# Altium PCB PCB3.PcbDoc
Units mil, origin at the board's own origin, x right, y up, seen from the top; angles counter-clockwise.
Board outline 4400 x 3600 mil, 4 copper layers (Top Layer, Int1 (GND), Int2 (GND), Bottom Layer), stack 53.912 mil thick; 56 components, 50 nets, 254 pads, 86 vias.
Unrouted connection lines stored in the file: 30.
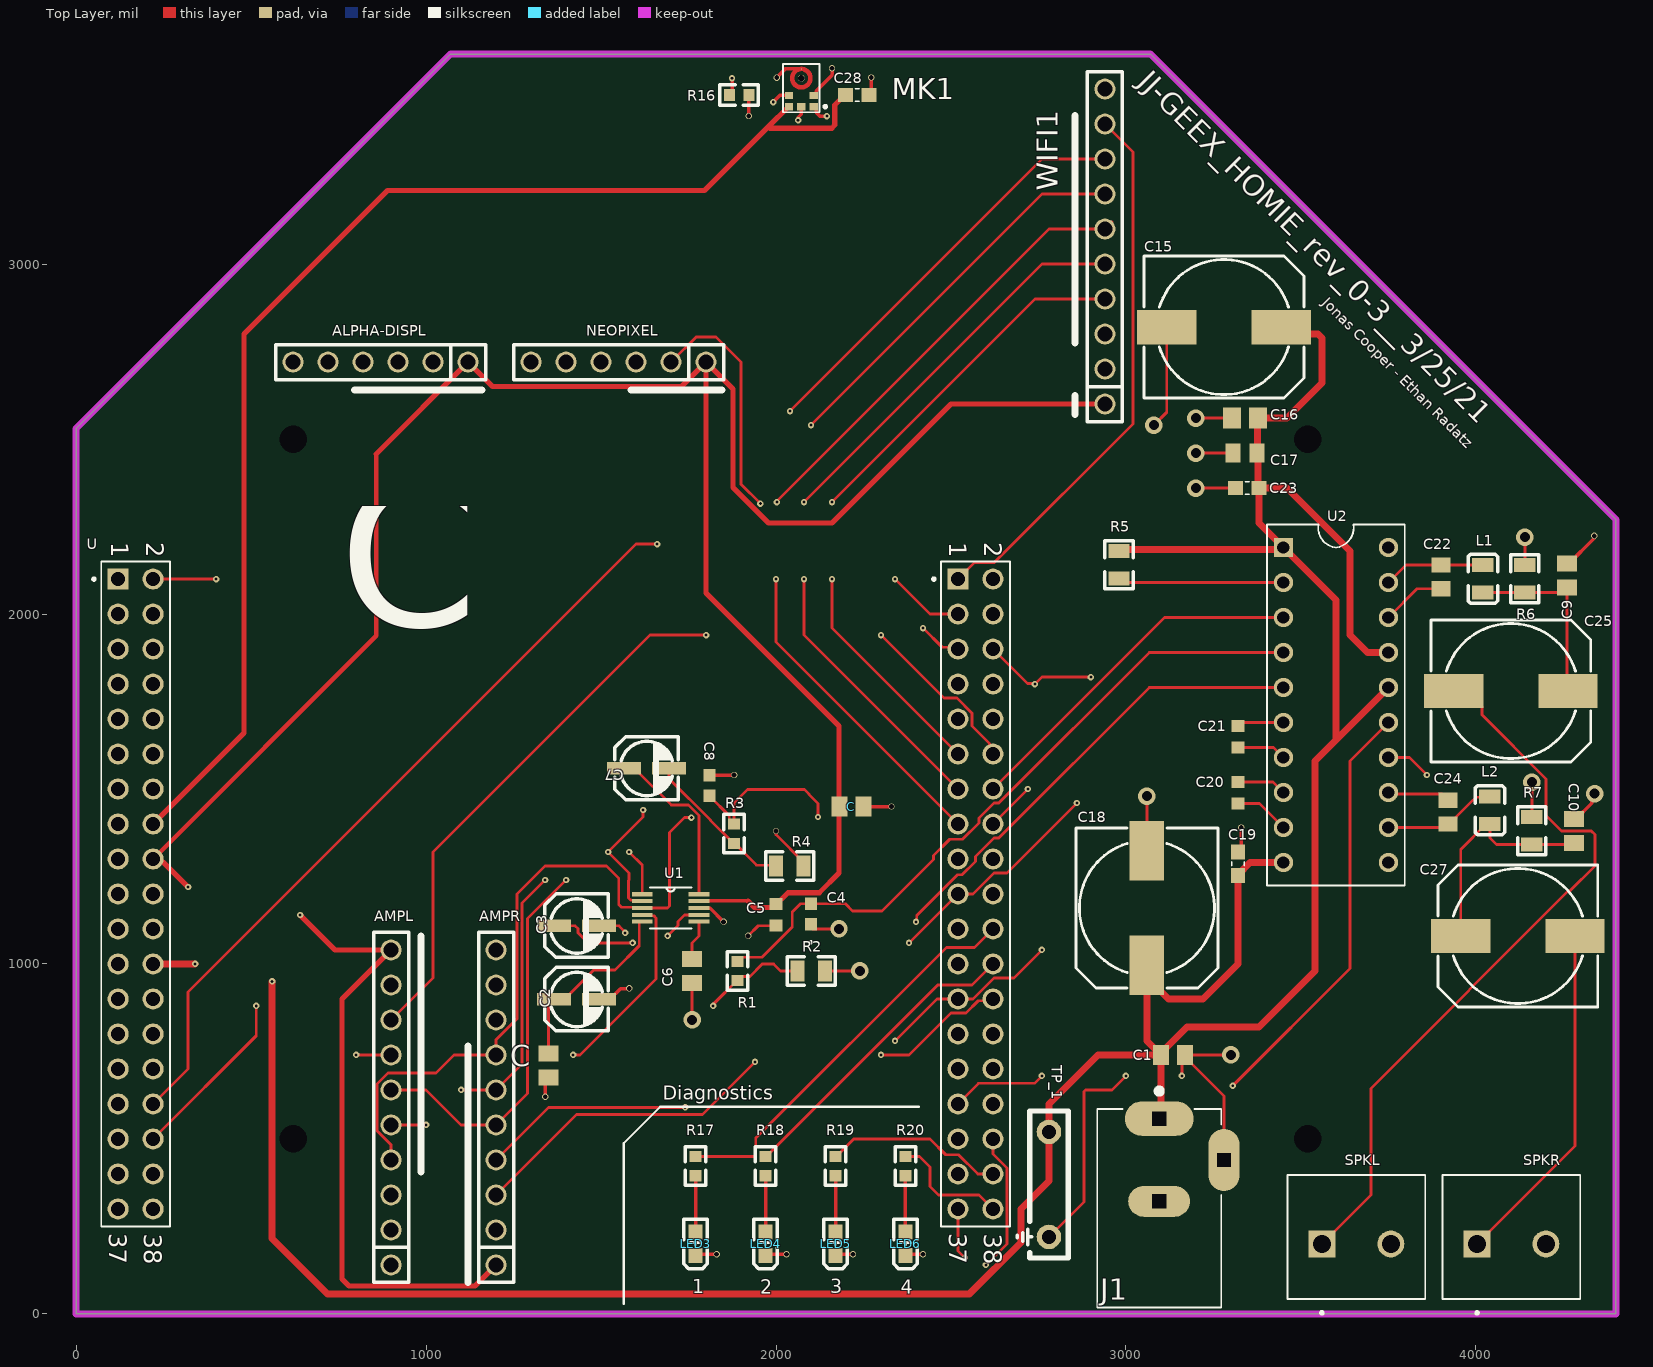
[diagram p0: Top Layer view]
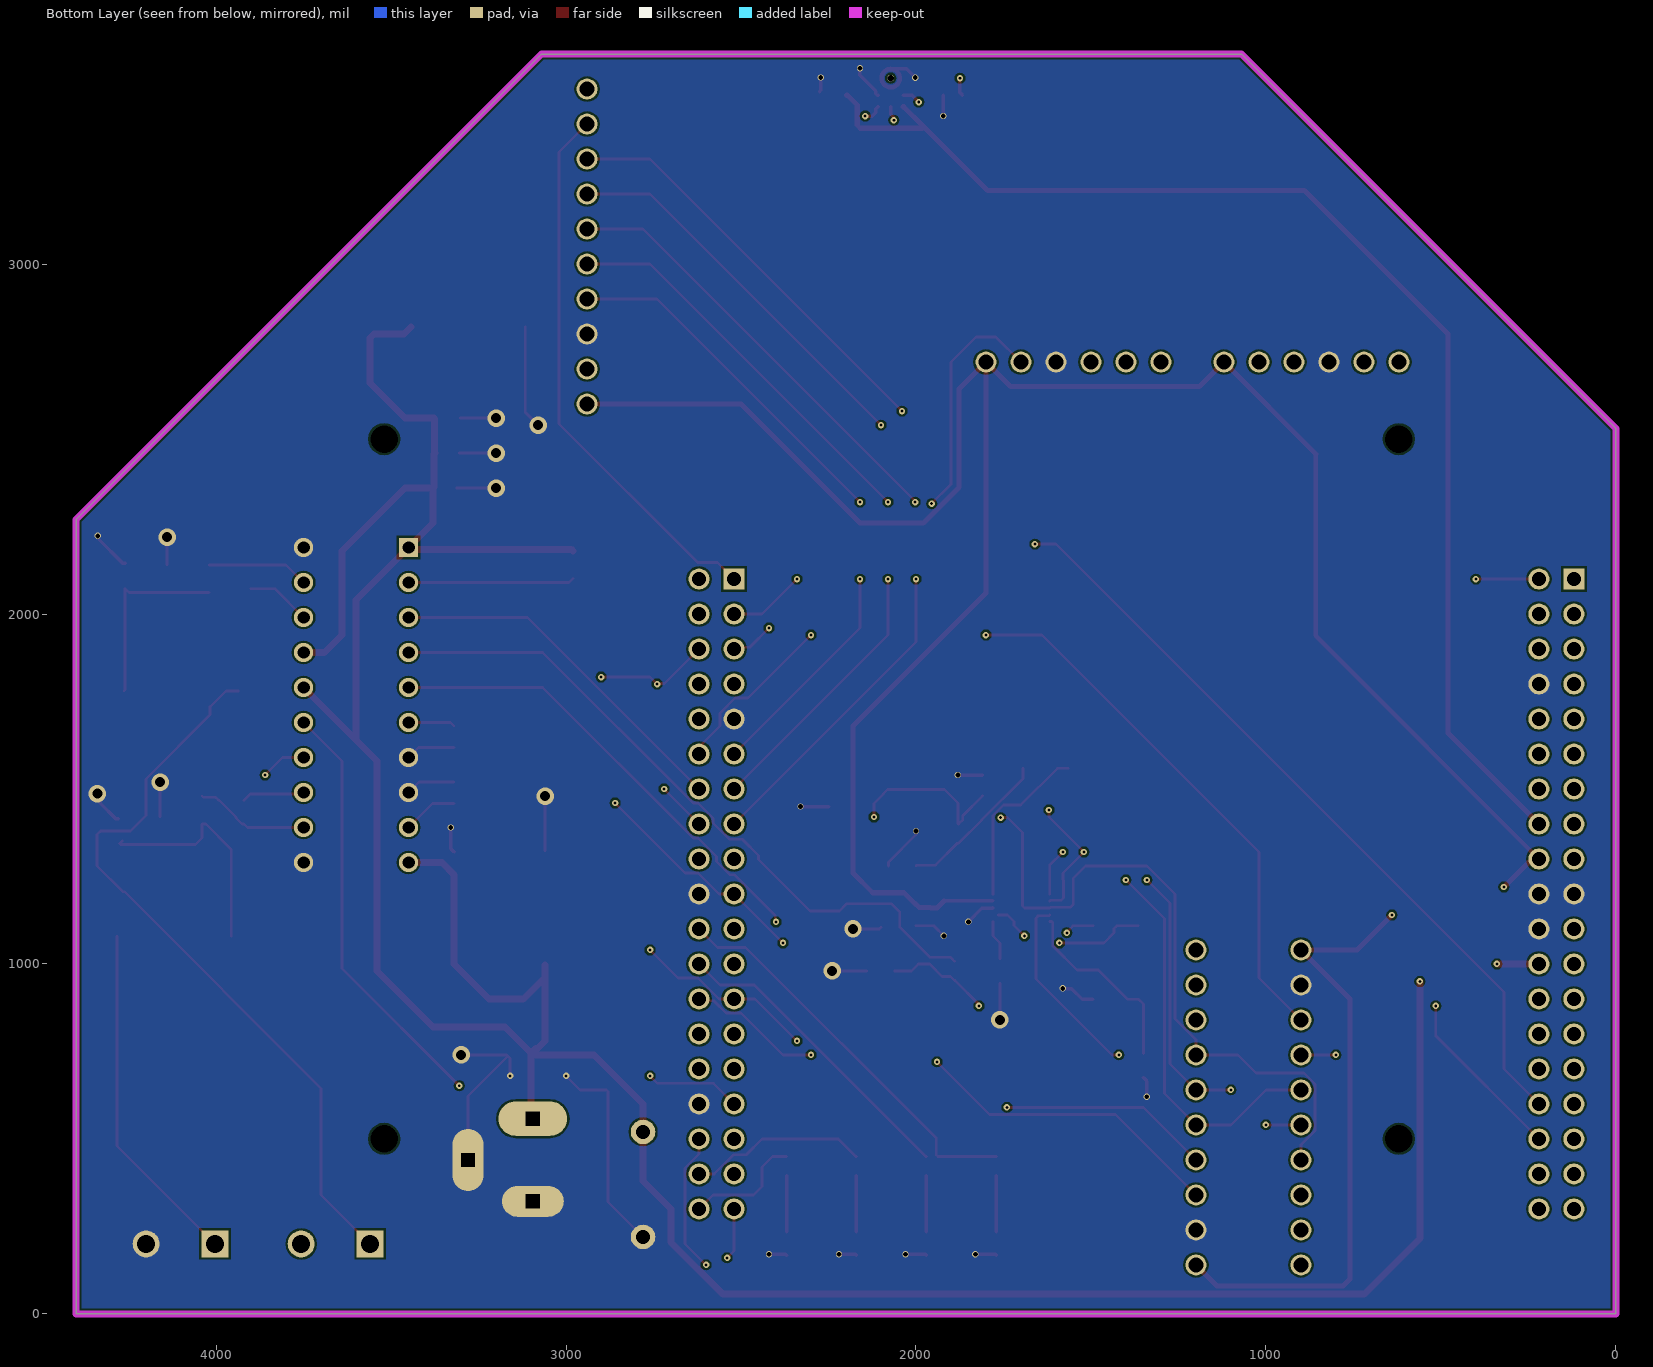
[diagram p1: Bottom Layer view, seen from below]
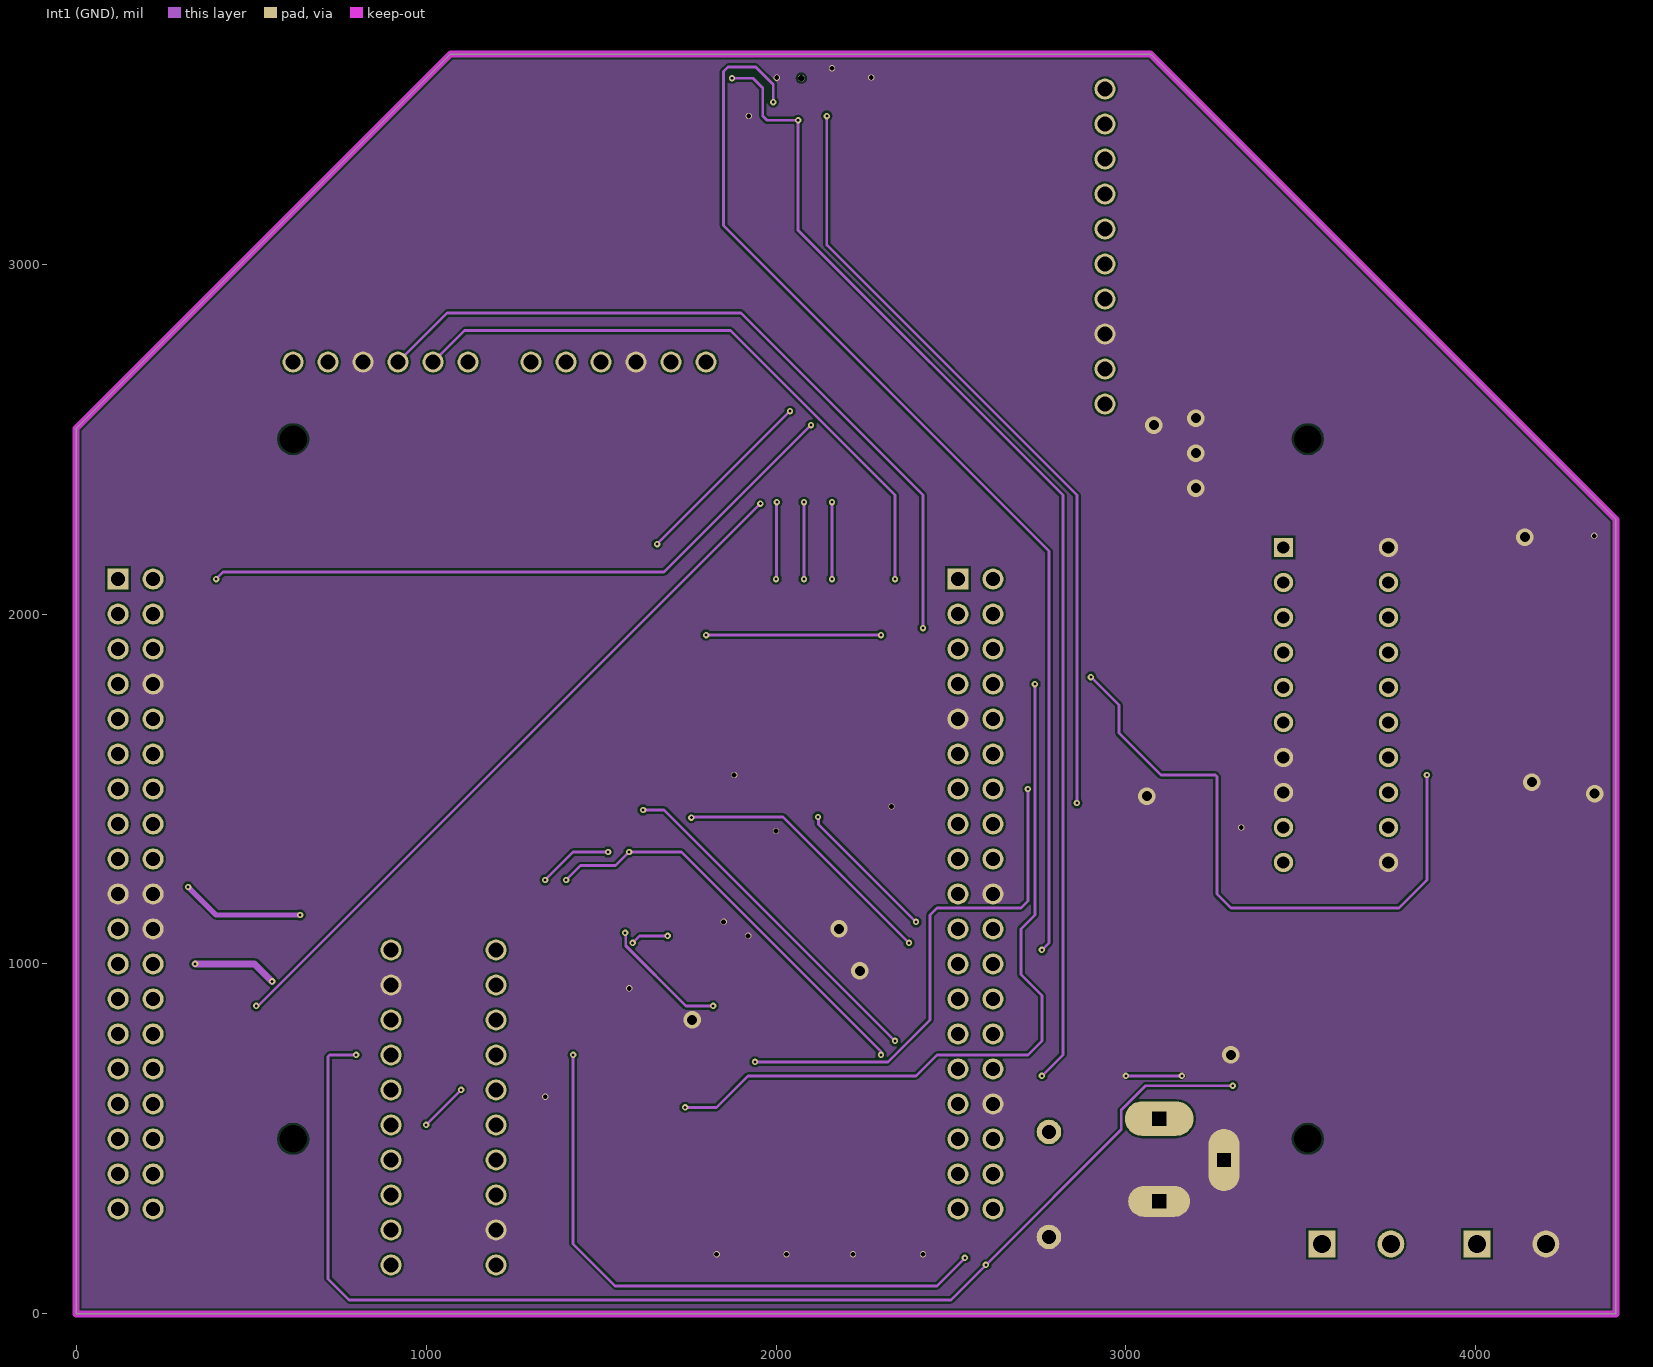
[diagram p2: Int1 (GND)]
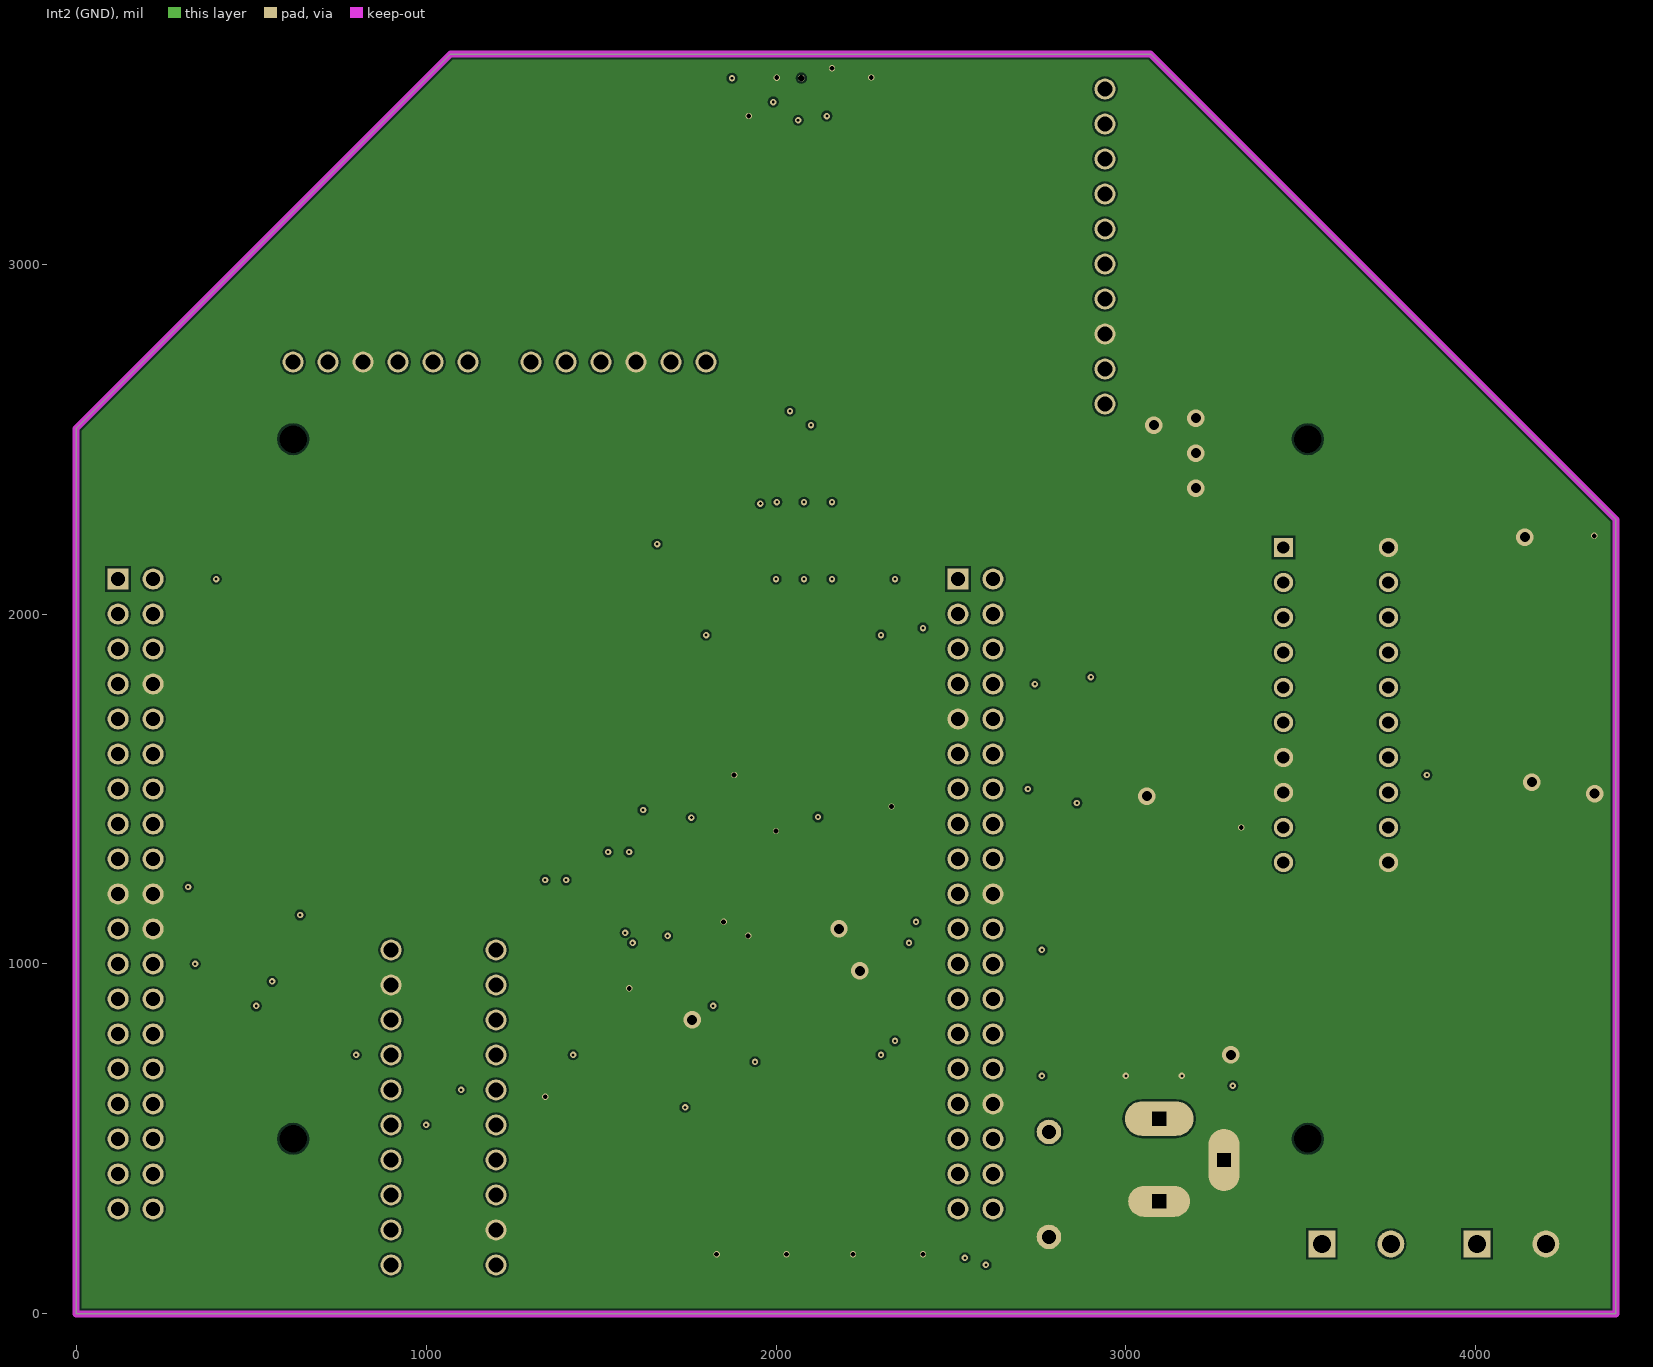
[diagram p3: Int2 (GND)]

## Layer stack, top to bottom
Top Solder: solder mask 1, SM-001, Dk 4
Top Layer: signal copper 1.378
Dielectric 1: prepreg 5.1, PP-017, Dk 4.3
Dielectric 2: prepreg 5.1, PP-017, Dk 4.3
Int1 (GND): signal copper 1.378
Dielectric 3: core 28, Core-039, Dk 4.8
Int2 (GND): signal copper 1.378
Dielectric 4: prepreg 5.1, PP-017, Dk 4.3
Dielectric 5: prepreg 5.1, PP-017, Dk 4.3
Bottom Layer: signal copper 1.378
Bottom Solder: solder mask 1, SM-001, Dk 4

## Board outline
0,0 0,2530 1070,3600 3070,3600 4400,2270 4400,0

## Design rules (kind name [scope] priority, off if disabled: settings)
Clearance [All] p1: gap=6 ignorepadtopadclearanceinfootprint=FALSE except(0: Arc-Hole Track-Hole SMDPad-Hole THPad-Hole Via-Hole Fill-Hole Poly-Hole Region-Hole Text-Hole)
MinimumSolderMaskSliver [All] p1: minsoldermaskwidth=6
PlaneClearance [All] p1: clearance=8
PlaneConnect [All] p1: planeconnectstyle=Direct reliefexpansion=20 reliefentries=4 reliefconductorwidth=10 reliefairgap=10
PolygonConnect [All] p1: connectstyle=Direct reliefconductorwidth=10 reliefentries=4 polygonreliefangle="90 Angle" airgapwidth=10
RoutingVias [All] p1: holewidth=8.27 width=18.5 viastyle="Through Hole" minholewidth=8.27 minwidth=18.5 maxholewidth=28 maxwidth=50
SilkToSilkClearance [All] p1: silktosilkclearance=6
SilkToSolderMaskClearance [IsPad] p1: minsilkscreentomaskgap=6 clearancetoexposedcopper=TRUE
SolderMaskExpansion [All] p1: expansion=4 istentingtop=FALSE
UnRoutedNet [All] p1: checkbadconnections=TRUE
Width "Schematic Width Constraint_1" [InNet('3V3_BRD')] p1: maxlimit=100 minlimit=6 preferedwidth=13 minimp=50.000000 maximp=50.000000 favimp=50.000000
Width 12vbrd [InNet('12V_BRD')] p2: maxlimit=20 minlimit=10 preferedwidth=20 minimp=50.000000 maximp=50.000000 favimp=50.000000
Width 5v [InNet('5V_BRD')] p3: maxlimit=15 minlimit=15 preferedwidth=15 minimp=50.000000 maximp=50.000000 favimp=50.000000
Width 3v3 [InNet('3V3_BRD')] p4: maxlimit=15 minlimit=15 preferedwidth=15 minimp=50.000000 maximp=50.000000 favimp=50.000000
Width 12v [InNet('12V')] p5: maxlimit=20 minlimit=20 preferedwidth=20 minimp=50.000000 maximp=50.000000 favimp=50.000000
Width [All] p6: maxlimit=10 minlimit=6 preferedwidth=8 minimp=50.000000 maximp=50.000000 favimp=50.000000
24 further rules are at their usual default settings.

## Classes and differential pairs
component class Sheet3.2_AMP: C9 C10 C15 C16 C17 C18 C19 C20 C21 C22 C23 C24 C25 C27 L1 L2 R5 R6 R7 SPKL SPKR U2
component class Sheet3.1_DAC: C C2 C3 C4 C5 C6 C7 C8 R1 R2 R3 R4 U1
component class Sheet1_MCU2.0: LED3 LED4 LED5 LED6 R17 R18 R19 R20 U
component class Sheet5_Pin_Headers: ALPHA-DISPL AMPL AMPR NEOPIXEL WIFI1
component class Sheet4_Audio_In: C28 MK1 R16
component class Sheet2_Power: C1 J1 TP_1

## Components (designator, comment, footprint, x,y, rotation, side; value= is the part's Value field where it differs from the comment)
ALPHA-DISPL "PPTC061LFBN-RC" 6_PIN_100MIL 1120,2720 r180 top value=Female
AMPL "PPTC101LFBN-RC" 10_PIN_100MIL 900,140 r90 top value=Female
AMPR "PPTC101LFBN-RC" 10_PIN_100MIL 1200,140 r90 top value=Female
C "C_10nf_0805" CAPC2012X140N 2215.55,1450 r0 top value=10nf
C "C_10nf_0805" CAPC2012X140N 1350,710 r270 top value=10nf
C1 "C_22uF_0805" CAPC2012X140N 3134.45,740 r0 top
C2 "CE_3.3uF_0405" Lelon3.3uf 1430,900 r180 top
C3 "CE_3.3uF_0405" Lelon3.3uf 1430,1110 r180 top
C4 "0603B272K500NT" CAP_0603_S_WAL 2100,1142.6 r90 top value=2.7nf
C5 "C_1uF_0603" CAPC1608X90N 2000,1140 r270 top value=1uF
C6 "C_22uF_0805" CAPC2012X140N 1760,980 r270 top
C7 "CE_3.3uF_0405" Lelon3.3uf 1630,1560 r180 top
C8 "0603B272K500NT" CAP_0603_S_WAL 1810,1510 r270 top value=2.7nf
C9 "C_.68uF_0805" CAPC2012X140N 4260,2110 r90 top
C10 "C_.68uF_0805" CAPC2012X140N 4280,1380 r270 top
C15 "CE_470uF_1010" 140CLH-1010 3280,2820 r0 top
C16 "C_100nf_0805" CAPC2012X70 3340,2560 r180 top
C17 "CL21A106KAYNNNE" CAPC2012X135N 3340,2460 r180 top
C18 "CE_470uF_1010" 140CLH-1010 3060,1160 r270 top
C19 "C_100nF_0603" CAPC1608X90 3320,1286.54 r90 top
C20 "C_1uF_0603" CAPC1608X90N 3320,1489.29 r90 top value=1uF
C21 "C_1uF_0603" CAPC1608X90N 3320,1649.29 r270 top value=1uF
C22 "C_220nf_0805" CAPC2012X135N 3900,2106.02 r90 top
C23 "C_100nF_0603" CAPC1608X90 3346.54,2360 r180 top
C24 "C_220nf_0805" CAPC2012X135N 3920,1433.98 r270 top
C25 "CE_470uF_1010" 140CLH-1010 4100,1780 r0 top
C27 "CE_470uF_1010" 140CLH-1010 4120,1080 r180 top
C28 "C_100nF_0603" CAPC1608X90 2232.26,3483.06 r0 top
J1 "PJ-002AH" CUI_PJ-002AH 3094.96,558.11 r270 top
L1 "22uH" L0805 4022.52,2100.55 r90 top
L2 "22uH" L0805 4042.52,1439.29 r90 top
LED3 "KT-0603R" LED0603-R-RD 1770,200 r90 top value=Red
LED4 "KT-0603R" LED0603-R-RD 1970,200 r90 top value=Red
LED5 "KT-0603R" LED0603-R-RD 2170,200 r90 top value=Red
LED6 "KT-0603R" LED0603-R-RD 2370,200 r90 top value=Red
MK1 "ICS-43434" MIC_ICS-43434 2072.26,3503.06 r180 top
NEOPIXEL "PPTC061LFBN-RC" 6_PIN_100MIL 1800,2720 r180 top value=Female
R1 "1 kOhm" R0603 1890,980 r90 top value=1kOhm
R2 "1 kOhm" R0805 2099.53,980.16 r180 top value=10kOhm
R3 "1 kOhm" R0603 1880,1372.44 r90 top value=1kOhm
R4 "1 kOhm" R0805 2038.27,1280.16 r180 top value=10kOhm
R5 "1 kOhm" R0805 2979.84,2139.53 r270 top value=10kOhm
R6 "1 kOhm" R0805 4139.84,2099.53 r270 top value=4.7kOhm
R7 "1 kOhm" R0805 4160.16,1381.73 r90 top value=4.7kOhm
R16 "100 kOhm" R0603 1894.7,3483.06 r180 top value=100kOhm
R17 "1 kOhm" R0603 1770,422.44 r270 top value=1kOhm
R18 "1 kOhm" R0603 1970,422.44 r270 top value=1kOhm
R19 "1 kOhm" R0603 2170,422.44 r270 top value=1kOhm
R20 "1 kOhm" R0603 2370,422.44 r270 top value=1kOhm
SPKL "TB001-500-02BE" CUI_TB001-500-02BE 3560,200 r0 top
SPKR "TB001-500-02BE" CUI_TB001-500-02BE 4003.15,200 r0 top
TP_1 "10x Probe TP" TP10x_Probe 2780,370 r270 top
U "ST-MORPHO-WB" ST-MORPHO-WB 1370,1725.59 r0 top
U1 "CS4344-CZZR" SOP50P490X110-10N 1699,1160 r0 top
U2 "TPA3122D2N" DIP20-2.54-26.2X7.62MM 3600,1740 r270 top
WIFI1 "PPTC101LFBN-RC" 10_PIN_100MIL 2940,2600 r90 top value=Female

## Footprints (in the part's own frame and the unit in brackets; to place one, negate y for a bottom-side part, rotate by r counter-clockwise, add the part's x,y. Pads: shape width x height; smd on the part's side, far side on the other; paste and mask are expansions set on the pad)
6_PIN_100MIL [mil]
  round 60 hole 43.31: 1(0,0) 2(100,0) 3(200,0) 4(300,0) 5(400,0) 6(500,0)
  silkscreen extent -50,-50 550,50
10_PIN_100MIL [mil]
  round 60 hole 43.31: 1(0,0) 2(100,0) 3(200,0) 4(300,0) 5(400,0) 6(500,0) 7(600,0) 8(700,0) 9(800,0) 10(900,0)
  silkscreen extent -50,-50 950,50
140CLH-1010 [mm]
  rect 4.3x2.5 smd: NEG(-4.15,0) POS(4.15,0)
  silkscreen extent -5.8,-5.15 5.8,5.15
CAP_0603_S_WAL [mil]
  rect 36x35 smd paste+0 mask+0: 1(-29.5,0) 2(29.5,0)
  silkscreen extent -83,-3 -78,3, body extent 0,0 10,10, height 10
CAPC1608X90 [mm]
  rect 1.1x1 smd: 1(-0.85,0) 2(0.85,0)
  silkscreen extent -0.15,-0.45 0.15,0.45
CAPC1608X90N [mm]
  rect 0.87x0.93 smd: 1(-0.78,0) 2(0.78,0)
CAPC2012X70 [mm]
  rect 1.3x1.5 smd: 1(-0.95,0) 2(0.95,0)
CAPC2012X135N [mm]
  rect 1.1x1.38 smd: 1(-0.863,0) 2(0.863,0)
CAPC2012X140N [mm]
  rect 1.16x1.47 smd: 1(-0.875,0) 2(0.875,0)
CUI_PJ-002AH [mm]
  oval 2.5x5 hole 1 square: 1(0,0)
  oval 2.25x4.5 hole 1 square: 2(6,0)
  oval 4.5x2.25 hole 1 square: 3(3,4.7)
  silkscreen extent -2.2,-4.5 13.7,4.5
CUI_TB001-500-02BE [mm]
  rect 1.95x1.95 hole 1.3: 1(0,0)
  round 1.95 hole 1.3: 2(5,0)
  silkscreen extent -2.5,-5.1 7.5,5
DIP20-2.54-26.2X7.62MM [mm]
  rect 1.4x1.4 hole 0.9: 1(-11.43,-3.81)
  round 1.4 hole 0.9: 2(-8.89,-3.81) 3(-6.35,-3.81) 4(-3.81,-3.81) 5(-1.27,-3.81) 6(1.27,-3.81) 7(3.81,-3.81) 8(6.35,-3.81) 9(8.89,-3.81) 10(11.43,-3.81) 11(11.43,3.81) 12(8.89,3.81) 13(6.35,3.81) 14(3.81,3.81) 15(1.27,3.81) 16(-1.27,3.81) 17(-3.81,3.81) 18(-6.35,3.81) 19(-8.89,3.81) 20(-11.43,3.81)
  silkscreen extent -13.1,-5 13.1,5, body extent -12.7,-5.46 12.7,5.46, height 5.08
L0805 [mm]
  rect 1x1.55 smd: 1(-0.998,0.064) 2(1.002,0.064)
  silkscreen extent -1.78,-1.02 1.78,1.14
LED0603-R-RD [mil]
  rect 43x39 smd: 1(34.5,0) 2(-32.5,0)
  silkscreen extent -70,-34 70,34
Lelon3.3uf [mm]
  rect 2.46x0.91 smd: NEG(-1.64,0.024) POS(1.64,0.024)
  silkscreen extent -2.3,-2.29 2.3,2.31
MIC_ICS-43434 [mm]
  rect 0.6x0.522 smd paste-1: 1(-0.9,1.361) 2(-0.9,0.539) 4(0.9,0.539) 5(0.9,1.361) 6(0,1.361)
  rect 0.1x0.1 smd paste-1 mask+0: 3(-0.015,-1.383)
  round 0.5 hole 0.5 unplated: ""(0,-0.713)
  Top Layer region: 250 vertices and 0 holes, not listed, extent -0.81,-1.53 0.81,0.1
  silkscreen extent -1.84,-1.75 1.33,1.75
R0603 [mm]
  rect 0.8x0.9 smd: 1(-0.7,0) 2(0.7,0)
  silkscreen extent -1.4,-0.75 1.4,0.76
R0805 [mm]
  rect 1x1.55 smd: 1(-1.028,0.004) 2(0.972,0.004)
  silkscreen extent -1.78,-1.02 1.72,1.02
SOP50P490X110-10N [mil]
  rect 59x12 smd: 1(-81,39) 2(-81,20) 3(-81,0) 4(-81,-20) 5(-81,-39) 6(81,-39) 7(81,-20) 8(81,0) 9(81,20) 10(81,39)
  silkscreen extent -59,-59 59,59
ST-MORPHO-WB [mm]
  rect 1.53x1.53 hole 1.02: CN7_1(-31.75,9.51) CN10_1(29.21,9.51)
  round 1.53 hole 1.02: CN7_2(-29.21,9.51) CN7_3(-31.75,6.97) CN7_4(-29.21,6.97) CN7_5(-31.75,4.43) CN7_6(-29.21,4.43) CN7_7(-31.75,1.89) CN7_8(-29.21,1.89) CN7_9(-31.75,-0.65) CN7_10(-29.21,-0.65) CN7_11(-31.75,-3.19) CN7_12(-29.21,-3.19) CN7_13(-31.75,-5.73) CN7_14(-29.21,-5.73) CN7_15(-31.75,-8.27) CN7_16(-29.21,-8.27) CN7_17(-31.75,-10.81) CN7_18(-29.21,-10.81) CN7_19(-31.75,-13.35) CN7_20(-29.21,-13.35) CN7_21(-31.75,-15.89) CN7_22(-29.21,-15.89) CN7_23(-31.75,-18.43) CN7_24(-29.21,-18.43) CN7_25(-31.75,-20.97) CN7_26(-29.21,-20.97) CN7_27(-31.75,-23.51) CN7_28(-29.21,-23.51) CN7_29(-31.75,-26.05) CN7_30(-29.21,-26.05) CN7_31(-31.75,-28.59) CN7_32(-29.21,-28.59) CN7_33(-31.75,-31.13) CN7_34(-29.21,-31.13) CN7_35(-31.75,-33.67) CN7_36(-29.21,-33.67) CN7_37(-31.75,-36.21) CN7_38(-29.21,-36.21) CN10_2(31.75,9.51) CN10_3(29.21,6.97) CN10_4(31.75,6.97) CN10_5(29.21,4.43) CN10_6(31.75,4.43) CN10_7(29.21,1.89) CN10_8(31.75,1.89) CN10_9(29.21,-0.65) CN10_10(31.75,-0.65) CN10_11(29.21,-3.19) CN10_12(31.75,-3.19) CN10_13(29.21,-5.73) CN10_14(31.75,-5.73) CN10_15(29.21,-8.27) CN10_16(31.75,-8.27) CN10_17(29.21,-10.81) CN10_18(31.75,-10.81) CN10_19(29.21,-13.35) CN10_20(31.75,-13.35) CN10_21(29.21,-15.89) CN10_22(31.75,-15.89) CN10_23(29.21,-18.43) CN10_24(31.75,-18.43) CN10_25(29.21,-20.97) CN10_26(31.75,-20.97) CN10_27(29.21,-23.51) CN10_28(31.75,-23.51) CN10_29(29.21,-26.05) CN10_30(31.75,-26.05) CN10_31(29.21,-28.59) CN10_32(31.75,-28.59) CN10_33(29.21,-31.13) CN10_34(31.75,-31.13) CN10_35(29.21,-33.67) CN10_36(31.75,-33.67) CN10_37(29.21,-36.21) CN10_38(31.75,-36.21)
  silkscreen extent -33.6,-37.48 32.98,10.78
TP10x_Probe [mil] "Small Probs footprint"
  round 70 hole 40: 1(-150,0) 2(150,0)
  silkscreen extent -210,-90 210,55

## Part data
ALPHA-DISPL NEOPIXEL: library part JF_6_PIN_FEMALE, "6 Position Header Connector 0.100\" (2.54mm) Through Hole Tin", Digikey Link=https://www.digikey.com/product-detail/en/PPTC061LFBN-RC/S7004-ND/810145/?itemSeq=304982353, Digikey Part=S7004-ND
AMPL AMPR WIFI1: library part JF_10_PIN_FEMALE, "10 Position Header Connector 0.100\" (2.54mm) Through Hole Tin", Digikey Link=https://www.digikey.com/product-detail/en/PPTC101LFBN-RC/S7008-ND/810149/?itemSeq=304982352, Digikey Part=S7008-ND
C C: "CL21B103KBANNNC    10000pF Â±10% 50V Ceramic Capacitor X7R 0805 (2012 Metric)", LCSC#=C1710, Package="0805 Samsung", Digi-Key_Part_Number=1276-1015-1-ND, DigiKey-Purchase-URL=https://snapeda.com/shop?store=DigiKey&id=46816, MF=Samsung, MP=CL21B103KBANNNC, SnapEDA_Link=https://www.snapeda.com/parts/CL21B103KBANNNC/Samsung%20Electro-Mechanics/view-part/46816/?ref=snap
C1 C6: "22µF 0805 ±20% 25V Ceramic Capacitor X5R 0805 (2012 Metric)", LCSC#=C45783, Package="0805 Samsung", Check_prices=https://www.snapeda.com/parts/CL21A226MAQNNNE/Samsung%20Electro-Mechanics/view-part/620487/?ref=eda, Digi-Key_Part_Number=1276-2908-1-ND, MF=Samsung, MP=CL21A226MAQNNNE, Purchase-URL=https://pricing.snapeda.com/search/part/CL21A226MAQNNNE/?ref=eda, SnapEDA_Link=https://www.snapeda.com/parts/CL21A226MAQNNNE/Samsung%20Electro-Mechanics/view-part/620487/?ref=snap
C2 C3 C7: "Aluminum Electrolytic Capacitors - SMD", LCSC#=C134505, Package=None, Availability=Unavailable, MF=Lelon, MP=VES3R3M1HTR-0405L, Price=None, SnapEDA_Link=https://www.snapeda.com/parts/VZH471M1ETR-1010/Lelon/view-part/2450679/?ref=snap
C4 C8: library part C_2.7nf_0603, "10nf 0603 cap", LCSC#=C1609, Package=0603, Manufacturer_Part_Number=0603B272K500NT, Vendor=FH
C5 C20 C21: "1uF ±10% 50V Ceramic Capacitor X7R 0603 (1608 Metric)", LCSC#=c15849, Package="0603 Samsung", Availability=Good, MF=Samsung, MP=CL10A105KB8NNNC, Price=None, SnapEDA_Link=https://www.snapeda.com/parts/CL10B102KB8NNNC/Samsung/view-part/544114/?ref=snap
C9 C10: ".68µF 0805 ±20% 25V Ceramic Capacitor X5R 0805 (2012 Metric)", LCSC#=C71069, Package="0805 Samsung", MF=Samsung, MP=CL21B684KOFNNNE
C15 C18 C25 C27: "Aluminum Electrolytic Capacitors - SMD", LCSC#=C249933, Package=None, Availability=Unavailable, MF=Lelon, MP=VZH471M1ETR-1010, Price=None, SnapEDA_Link=https://www.snapeda.com/parts/VZH471M1ETR-1010/Lelon/view-part/2450679/?ref=snap
C16: "0.1ÂµF Â±10% 50V Ceramic Capacitor X7R 0805 _2012 Metric_  CC0805KRX7R9BB104", LCSC#=C49678, Package="0805 Yageo", MF=Yageo, MP=CC0805KRX7R9BB104, Price=None, SnapEDA_Link=https://www.snapeda.com/parts/CC0805KRX7R9BB104/Yageo/view-part/105548/?ref=snap
C17: "10ÂµF Â±10% 25V Ceramic Capacitor X5R 0805 (2012 Metric)CL21A106KAYNNNE", LCSC#=C15850, Package="0805 Samsung", Check_prices=https://www.snapeda.com/parts/CL21A106KAYNNNE/Samsung/view-part/3598482/?ref=eda, MF=Samsung, MP=CL21A106KAYNNNE, SnapEDA_Link=https://www.snapeda.com/parts/CL21A106KAYNNNE/Samsung/view-part/3598482/?ref=snap
C19 C23 C28: "0.1µF/100nF  Â±10% 50V Ceramic Capacitor X7R 0603 _1608 Metric_", LCSC#=C14663, Package="0603 Yageo", Digi-Key_Part_Number=311-1344-1-ND, Digi-Key_Purchase_URL=https://www.digikey.com/product-detail/en/yageo/CC0603KRX7R9BB104/311-1344-1-ND/2103128?utm_source=snapeda&utm_medium=aggregator&utm_campaign=symbol, MF=Yageo, MP=CC0603KRX7R9BB104, SnapEDA Link=https://www.snapeda.com/parts/CC0603KRX7R9BB104/Yageo/view-part/78680/?ref=snap
C22 C24: "CL21B224KBFNNNE", LCSC#=C5378, Package=None, Availability=Unavailable, MP=CL21B224KBFNNNE
J1: "2.0 x 6.5 mm, 5.0 A, Horizontal, Through Hole, Dc Power Jack Connector", Package=None, CUI_purchase_URL=https://www.cuidevices.com/product/interconnect/connectors/dc-power-connectors/jacks/pj-002ah?utm_source=snapeda.com&utm_medium=referral&utm_campaign=snapedaBOM, Digi-Key_Part_Number=CP-002AH-ND, Digi-Key_Purchase_URL=https://www.digikey.com/product-detail/en/cui-devices/PJ-002AH/CP-002AH-ND/408446?utm_source=snapeda&utm_medium=aggregator&utm_campaign=symbol, MF="CUI Devices", MP=PJ-002AH, SnapEDA_Link=https://www.snapeda.com/parts/PJ-002AH/CUI%20Devices/view-part/448876/?ref=snap
L1 L2: library part L_22uH, "22uH SDFL2012T220KTF", LCSC=C32375, Manufacturer_Part_Number=SDFL2012T220KTF, Built_By="Jonas Cooper", Vendor=Sunlord
LED3 LED4 LED5 LED6: library part LED_RED_0603, "LIGHT EMITTING DIODES (LED) RED 520~625NM 90~100MCD@20MA TOP VIEW 0603 ROHS", LCSC#=C2286, MFR="Hubei KENTO Elec", MFR#=KT-0603R
MK1: "60Hz ~ 20kHz Digital, IÂ²S Microphone MEMS _Silicon_ 1.65V ~ 3.63V Omnidirectional _-26 Â±1dB @ 94dB SPL_ Solder Pads", Package="TDK InvenSense", Availability=Unavailable, MF="TDK InvenSense", MP=ICS-43434, Price=None, SnapEDA_Link=https://www.snapeda.com/parts/ICS-43434/TDK%20InvenSense/view-part/4478548/?ref=snap
R1 R3 R17 R18 R19 R20: library part R_1kOhm_0603, "1kOhm +-1%  0603", LCSC#=21190, MFR=Uniroyal, MFR#=0603WAF1001T5E
R2 R4 R5: library part R_10kOhm_0805, "10kOhm +-1%  0805", LCSC#=C17414, MFR=Uniroyal, MFR#=0805W8F1002T5E
R6 R7: library part R_4.7kOhm_0805, "4.7kOhm +-1%  0805", LCSC#=C17673, MFR=Uniroyal, MFR#=0805W8F4701T5E
R16: library part R_100kOhm_0603, "100kOhm +-1%", LCSC#=C25803, MFR=Uniroyal, MFR#=0603WAF1003T5E
SPKL SPKR: "2~24 Poles, Screw Type, Horizontal, 5.0 Pitch, 22~12 _AWG_, Terminal Block Connector", Package=None, Availability=Unavailable, CUI_purchase_URL=https://www.cuidevices.com/product/interconnect/connectors/terminal-blocks/tb001-500-series?utm_source=snapeda.com&utm_medium=referral&utm_campaign=snapedaBOM, MF="CUI Devices", MP=TB001-500-02BE, Price=None, SnapEDA_Link=https://www.snapeda.com/parts/TB001-500-02BE/CUI%20Devices/view-part/3590292/?ref=snap
TP_1: library part TP_10x_Probe, "Test Point 300 mil centers"
U: "P-NUCLEO-WB55 Header Footprint", Package="TSOT-23 STMicroelectronics", Availability=Unavailable, MF=STMicroelectronics, MP=NUCLEO-F030R8, Price=None, SnapEDA_Link=https://www.snapeda.com/parts/NUCLEO-F030R8/STMicroelectronics/view-part/240805/?ref=snap
U1: "DAC, Audio 24 b 192k IÂ²S 10-SSOP", JLC PartNum=C8952, Package="TSSOP-10 Cirrus Logic", Availability=Unavailable, MF="Cirrus Logic", MP=CS4344-CZZR, SnapEDA_Link=https://www.snapeda.com/parts/CS4344-CZZR/Cirrus%20Logic%20Inc./view-part/33568/?ref=snap
U2: "15-W stereo, 30-W mono, 10- to 26-V supply, analog input Class-D audio amplifier w/ SE output in DIP 20-PDIP -40 to 85", Package="PDIP-20 Texas Instruments", Availability=Warning, Check_prices=https://www.snapeda.com/parts/TPA3122D2N/Texas%20Instruments/view-part/321530/?ref=eda, MF="Texas Instruments", MP=TPA3122D2N, Price=None, Purchase-URL=https://pricing.snapeda.com/search/part/TPA3122D2N/?ref=eda, SnapEDA_Link=https://www.snapeda.com/parts/TPA3122D2N/Texas%20Instruments/view-part/321530/?ref=snap

## Free pads (board coordinates)
  round 0 hole 78.74 unplated: 2(620,500) 3(620,2500) 4(3520,500) 6(3520,2500)

## Via types
v1: diameter 18.5, hole 8.27, Top Layer to Bottom Layer, 57 vias
v2: diameter 18.5, hole 13, Top Layer to Bottom Layer, 15 vias
v3: diameter 50, hole 28, Top Layer to Bottom Layer, 12 vias
v4: diameter 18, hole 13, Top Layer to Bottom Layer, 2 vias

## Nets (pads, with @x,y where several pads share a name; then routed paths per layer and width w, separated by ;. In a path a pad name is that pad's centre, name@x,y a point inside that pad or via, vN(x,y) a via of type N, cw(c..) or ccw(c..) an arc to the next point about the centre after c; other vN are vias at no path point)
3V3_BRD: C28.1 MK1.5 U.CN7_16 | length 3628.2
  Top Layer w15: U.CN7_16 344.33,1524.33 480,1660 480,2800 890,3210 1795.81,3210 1978.87,3393.06 ; MK1.5 2035.29,3449.47 1978.87,3393.06 ; C28.1 2198.18,3482.45 2196.21,3482.45 2168.01,3454.24 2168.01,3397.09 2159.22,3388.3 1983.62,3388.3 1978.87,3393.06
5V_BRD: ALPHA-DISPL.1 AMPL.10 AMPR.1 C5.1 C.1@2181.1,1450 NEOPIXEL.1 U1.9 U.CN7_18 WIFI1.1 | length 8492.9
  Top Layer w10: U1.9 1920,1180
  Top Layer w13: U.CN7_18 857.5,1937.5 857.5,2457.5
  Top Layer w15: U.CN7_18 228.66,1291.34 248.66,1291.34 v1(320,1220) ; v1(640,1140) 740,1040 AMPL.10 760,900 760,100 780,80 1140,80 AMPR.1 ; 857.5,2457.5 ALPHA-DISPL.1 1190,2650 1730,2650 NEOPIXEL.1 ; 1920,1180 1940,1160 1958.11,1160 1959.19,1161.08 1990.37,1161.08 C5.1 2001.18,1170.71 2034.07,1203.6 2123.6,1203.6 2180,1260 2180,1680 1800,2060 NEOPIXEL.1 ; WIFI1.1 2500,2600 2160,2260 1978.59,2260 1877.28,2361.3 1877.28,2642.72 NEOPIXEL.1
  Int1 (GND) w15: v1(320,1220) 400,1140 v1(640,1140)
12V_BRD: C1.1 C15.POS C16.1 C17.1 C18.POS C19.1 C23.1 J1.1 R5.1 TP_1.1 U2.1 U2.10 U2.16 U2.17 U.CN7_24 | length 9466.8
  Top Layer w20: U.CN7_24 v1(340,1000) ; v1(560,950) 560,215.08 718.58,56.5 2552.21,56.5 2700,204.29 2700,300 2780,380 TP_1.1 2780,600 2920,740 C1.1 ; R5.1 2985,2185 3445,2185 U2.1 ; C18.POS C18.POS@3060,961.18 ; J1.1 3100,563.15 C1.1 ; C15.POS 3463.39,2800 3548.28,2800 3560,2788.28 3560,2660 3460,2560 C16.1 3375.69,2558.29 3375.69,2461.71 C17.1 3376.99,2456.99 3376.99,2363.01 C23.1 ; U2.10 3354.96,1290 3320,1255.04 C19.1 3320,1000 3220,900 3121.18,900 C18.POS@3060,961.18 ; U2.16 3600,1640 ; U2.17 3690,1890 3640,1940 3640,2180 3460,2360 C23.1 ; C18.POS@3060,961.18 3060,780 3081.06,758.94 3087.17,758.94 C1.1@3100,746.1 ; C1.1 C1.1@3100,746.1 ; C1.1@3100,746.1 3173.9,820 3380,820 3540,980 3540,1580 3600,1640 ; C23.1 3380,2260 U2.1 ; U2.1 3600,2040 3600,1640
  Int1 (GND) w20: v1(340,1000) 510,1000 v1(560,950)
GND: ALPHA-DISPL.4 AMPL.9 AMPR.2 C1.2 C2.NEG C4.1 C5.2 C6.2 C8.1 C9.2 C10.1 C15.NEG C16.2 C17.2 C18.NEG C19.2 C20.2 C21.2 C23.2 C28.2 C.2 J1.2 J1.3 LED3.2 LED4.2 LED5.2 LED6.2 MK1.2 MK1.3 NEOPIXEL.3 R2.1 R4.1 R6.1 R7.2 R16.1 SPKR.2 TP_1.2 U1.8 U2.7 U2.8 U2.11 U2.20 U.CN7_8 U.CN7_19 U.CN7_20 U.CN7_22 U.CN10_9 U.CN10_20 U.CN10_32 WIFI1.3 | length 4242
  Top Layer w8: v3(1760,840) C6.2 ; v2(1920,1080) 1949.29,1109.29 C5.2 ; v2(2000,1380) 2000,1369.57 2078.74,1290.83 R4.1 ; C4.1@2100,1105.2 2105.2,1100 v3(2180,1100) ; R2.1 v3(2240,980) ; TP_1.2 2880,320 2880,635.31 2884.69,640 2960,640 v1(3000,680) ; C18.NEG v3(3060,1480) ; v3(3080,2540) 3116.61,2576.61 C15.NEG ; v1(3160,680) 3160,731.1 C1.2 ; v3(3200,2360) C23.2 ; v3(3200,2460) C17.2 ; v3(3200,2560) C16.2 ; J1.3 3280,622.8 3168.9,733.9 C1.2 ; v3(3300,740) C1.2 ; C20.2 3420,1520 U2.8 ; C21.2 3421.42,1618.58 U2.7 ; R6.1 v3(4140,2220) ; R7.2 v3(4160,1520)
  Top Layer w10: v2(1340,620) 1340,665.55 C.2@1350,675.55 ; C2.NEG 1525.09,899.06 1555.75,929.72 1579.72,929.72 v2(1580,930) ; LED3.2 1772.5,170 v2(1830,170) ; U1.8 1781,1159 1812.06,1159 1850,1121.06 v2(1850,1120) ; C8.1 1810.5,1540 v2(1880,1540) ; v4(1922.26,3423.06) R16.1 ; LED4.2 1972.5,170 v2(2030,170) ; v2(2002.26,3533.06) 2026.7,3557.51 MK1.3 ; MK1.2 2109.22,3481.84 2114.5,3487.11 2114.5,3494.5 2160,3540 v2(2160,3560) ; LED5.2 2172.5,170 v2(2220,170) ; C.2@2250,1450 v2(2330,1450) ; v4(2272.26,3533.06) 2272.26,3496.52 C28.2@2275.72,3493.06 ; LED6.2 2372.5,170 v2(2420,170) ; C19.2 3330,1330 v2(3330,1390) ; C9.2 4266.1,2144.45 4336.37,2214.72 4336.37,2221.37 v2(4338,2223) ; C10.1 4286.1,1414.45 4331.35,1459.69 4331.35,1479.35 v3(4339,1487)
  Int1 (GND) w8: v1(3000,680) v1(3160,680)
  Bottom Layer w10: NEOPIXEL.3 NEOPIXEL.3@1602.98,2717.02
NetALPHA-DISPL_2: ALPHA-DISPL.2 U.CN10_3 | length 2013.4
  Top Layer w8: v1(2340,2100) 2440,2000 U.CN10_3
  Int1 (GND) w8: ALPHA-DISPL.2 1110,2810 1870,2810 2340,2340 v1(2340,2100)
NetALPHA-DISPL_3: ALPHA-DISPL.3 U.CN10_5 | length 2271.2
  Top Layer w8: v1(2420,1960) 2475.04,1904.96 U.CN10_5@2515.04,1904.96
  Int1 (GND) w8: ALPHA-DISPL.3 1060,2860 1900,2860 2420,2340 v1(2420,1960)
NetAMPL_4: AMPL.4 AMPR.7 MK1.1 U1.3 U.CN10_19 | length 5679.6
  Top Layer w8: AMPL.4 900,483.43 860,523.43 860,656.57 891.72,688.28 1028.28,688.28 1080,740 AMPR.7 1200,783.43 1260,843.43 1260,1200 1340,1280 1515.31,1280 1550.84,1244.48 1550.84,1169.16 1558,1162 1616,1162 U1.3 1690.2,1160 1696,1165.8 1696,1376 1738.75,1418.75 1757.95,1418.75 v1(1758.35,1418.35) ; v1(2380,1060) U.CN10_19 2563.26,1200 2623.15,1259.88 2659.88,1259.88 v1(2860,1460)
  Top Layer w10: MK1.1 2109.22,3449.47 2114.5,3444.2 2114.5,3433.11 2124.56,3423.06 v1(2145.26,3423.06)
  Int1 (GND) w8: v1(1758.35,1418.35) 1760,1420 2020,1420 v1(2380,1060) ; v1(2145.26,3423.06) 2145.26,3054.74 2860,2340 v1(2860,1460)
NetAMPL_5: AMPL.5 AMPR.6 MK1.4 U1.2 U.CN10_25 | length 6269.1
  Top Layer w8: AMPL.5 v1(1000,540) ; v1(1100,640) AMPR.6 1274,714 1274,1174 v1(1340,1240) ; U1.2 1616,1182 1585.36,1182 1578.5,1188.86 1578.5,1238.5 1580,1240 1580,1260 v1(1520,1320) 1620,1420 v1(1620,1440) ; v1(2340,780) 2460,900 U.CN10_25 2563.26,900 2623.15,959.88 2679.88,959.88 v1(2760,1040)
  Top Layer w10: v1(1992.26,3463.06) 2011.04,3481.84 MK1.4
  Int1 (GND) w8: v1(1000,540) v1(1100,640) ; v1(1340,1240) 1420,1320 v1(1520,1320) ; v1(1620,1440) 1680,1440 v1(2340,780) ; v1(1992.26,3463.06) 1992.26,3513.06 1942.26,3563.06 1863.06,3563.06 1850,3550 1850,3110 2780,2180 2780,1060 v1(2760,1040)
NetAMPL_6: AMPL.6 AMPR.5 U1.1 U.CN10_26 | length 2826.2
  Top Layer w8: AMPL.6 1000,640 1100,540 AMPR.5 1290,630 1290,1130 v1(1400,1240) ; v1(1580,1320) 1618,1282 U1.1 ; v1(2300,740) 2380,740 2499.88,859.88 2542.95,859.88 2577.88,894.82 2614.82,894.82 U.CN10_26
  Int1 (GND) w8: v1(1400,1240) 1441,1281.01 1541,1281.01 v1(1580,1320) 1729.5,1320 2300,749.5 v1(2300,740)
NetAMPL_7: AMPL.7 U2.15 U.CN10_34 | length 5337.3
  Top Layer w8: v1(800,740) AMPL.7 ; v1(2600,140) 2660.12,200.12 2660.12,416.62 2620,456.74 U.CN10_34 ; v1(3305,652) 3640,987 3640,1580 U2.15
  Int1 (GND) w8: v1(800,740) 724.69,740 720,735.31 720,100 780,40 2500,40 v1(2600,140) 2986.54,526.54 2986.54,582.64 3055.9,652 v1(3305,652)
NetAMPL_8: AMPL.8 U.CN10_12 | length 2560.6
  Top Layer w8: AMPL.8 1020,960 1020,1320 1640,1940 v1(1800,1940) ; v1(2300,1940) 2480.12,1759.88 2516.85,1759.88 2560.12,1716.62 2560.12,1679.88 2610.01,1629.99 2610.01,1609.99 U.CN10_12
  Int1 (GND) w8: v1(1800,1940) v1(2300,1940)
NetAMPR_3: AMPR.3 U.CN10_16 | length 2505.1
  Top Layer w8: AMPR.3 1430,570 1790,570 v1(1940,720) ; U.CN10_16 v1(2720,1500)
  Int1 (GND) w8: v1(1940,720) 2319.8,720 2440,840.2 2440,1140 2460,1160 2503.26,1160 2503.38,1159.88 2699.88,1159.88 2720,1180 v1(2720,1500)
NetAMPR_4: AMPR.4 U2.14 U.CN10_6 | length 5031.4
  Top Layer w8: AMPR.4 1350,590 v1(1740,590) ; U.CN10_6 2718.75,1801.25 2741.25,1801.25 2760,1820 v1(2900,1820) ; U2.14 3810,1590 v1(3860,1540)
  Int1 (GND) w8: v1(1740,590) 1830,590 1920,680 2400,680 2460.12,740.12 2720.12,740.12 2760,780 2760,910 2700,970 2700,1100 2740,1140 v1(2740,1800) ; v1(2900,1820) 2980,1740 2980,1660 3100,1540 3255.31,1540 3260,1535.31 3260,1200 3300,1160 3780,1160 3860,1240 v1(3860,1540)
NetC2_POS: C2.POS C.1@1350,744.45 U1.5 | length 545.6
  Top Layer w8: C.1@1350,744.45 1350,885.15 1363.91,899.06 C2.POS 1395.94,899.06 1479.38,982.5 1539.73,982.5 1609.25,1052.03 1609.25,1119 1611.25,1121 U1.5
NetC3_NEG: C3.NEG R1.1 R2.2 | length 743.7
  Top Layer w8: C3.NEG 1550.94,1109.06 1569,1091 v1(1569,1089) ; v1(1820,880) 1822.01,882.01 1822.01,886.43 1888.03,952.44 R1.1 1901.75,964.19 1925.2,964.19 1960.75,999.75 1993.29,999.75 2013.04,980 R2.2
  Int1 (GND) w8: v1(1569,1089) 1570.75,1087.25 1570.75,1052.03 1742.77,880 v1(1820,880)
NetC3_POS: C3.POS U1.7 | length 467.5
  Top Layer w8: C3.POS 1425.85,1109.06 1433.93,1100.98 1433.93,1089.23 1463.16,1060 v1(1590,1060) ; v1(1690,1080) 1720,1110 1720,1121.16 1738.84,1140 U1.7@1766,1140
  Int1 (GND) w8: v1(1590,1060) 1610,1080 v1(1690,1080)
NetC4_2: C4.2 R1.2 U2.4 | length 1981.6
  Top Layer w8: R1.2 1901.75,1019.31 1959.59,1019.31 2046.47,1106.19 2046.47,1148.07 2070.5,1172.1 C4.2 2198.05,1172.1 2218.53,1151.61 2303.08,1151.61 2450,1298.53 2450,1310 2496.57,1356.57 2533.31,1356.57 2579.88,1403.15 2579.88,1416.62 2623.15,1459.88 2636.62,1459.88 3066.74,1890 U2.4
NetC6_1: C6.1 U1.6 | length 114.8
  Top Layer w8: C6.1 1760,1060 1780,1080 U1.6
NetC7_NEG: C7.NEG R3.1 R4.2 | length 439
  Top Layer w8: C7.NEG 1694.58,1529.15 1812.62,1411.1 1812.62,1410.3 1878.03,1344.88 1881.97,1344.88 1944.51,1282.34 1997.66,1282.34 R4.2
NetC7_POS: C7.POS U1.10 | length 495.5
  Top Layer w8: C7.POS 1595.94,1559.06 1700.93,1454.07 1749.85,1454.07 1780,1423.92 U1.10
NetC8_2: C8.2 R3.2 U2.5 | length 2243.5
  Top Layer w8: C8.2 1810,1480 1866.28,1423.72 1866.28,1411.75 1878.03,1400 R3.2 1880,1459.76 1918.82,1498.58 2081.18,1498.58 2094.31,1485.46 2094.31,1484.28 2120,1458.58 v1(2120,1420) ; v1(2400,1120) 2402.01,1122.01 2402.01,1138.75 2518.21,1254.94 2531.68,1254.94 2570,1293.26 2570,1306.74 2623.15,1359.88 2636.62,1359.88 3066.74,1790 U2.5
  Int1 (GND) w8: v1(2120,1420) 2121.25,1418.75 2121.25,1398.75 v1(2400,1120)
NetC9_1: C9.1 C25.POS L1.1 R6.2 | length 537.9
  Top Layer w8: L1.1 R6.2 4249.21,2061.26 4260,2072.05 4260,1783.39 C25.POS
NetC10_2: C10.2 C27.POS L2.1 R7.1 | length 657
  Top Layer w8: C27.POS 3956.61,1327.44 4029.17,1400 L2.1 4040,1360 4058.74,1341.26 R7.1 4273.31,1341.26 4276.02,1343.98 C10.2@4268.07,1351.93
NetC20_1: C20.1 U2.9 | length 158.4
  Top Layer w8: C20.1 3381.42,1458.58 U2.9
NetC21_1: C21.1 U2.6 | length 134.1
  Top Layer w8: C21.1 3330,1690 U2.6
NetC22_1: C22.1 U2.18 | length 184
  Top Layer w8: U2.18 3832.05,2072.05 C22.1
NetC22_2: C22.2 L1.2 U2.19 | length 290.7
  Top Layer w8: U2.19 3800,2140 C22.2 L1.2
NetC24_1: C24.1 U2.13 | length 179.1
  Top Layer w8: U2.13 3754.39,1485.61 3902.35,1485.61 C24.1
NetC24_2: C24.2 L2.2 U2.12 | length 328.5
  Top Layer w8: U2.12 3910,1390 C24.2 3925.51,1400 3943.17,1417.65 3943.17,1419.81 3991.44,1468.08 3992.77,1468.08 4000.85,1476.16 4036.16,1476.16 L2.2@4040,1480
NetC25_NEG: C25.NEG SPKL.1 | length 2143.4
  Top Layer w8: SPKL.1 3700,340 3700,644.61 4262.06,1206.68 4266.68,1206.68 4340,1280 4340,1370 4329.72,1380.28 4244.72,1380.28 4200.51,1424.48 4200.51,1528.99 4017.26,1712.24 4017.26,1734.79 3972.05,1780 C25.NEG
NetC27_NEG: C27.NEG SPKR.1 | length 996.1
  Top Layer w8: SPKR.1 4283.39,480.24 C27.NEG
NetLED3_1: LED3.1 R17.2 | length 160.4
  Top Layer w10: LED3.1 R17.2
NetLED4_1: LED4.1 R18.2 | length 160.4
  Top Layer w10: LED4.1 R18.2
NetLED5_1: LED5.1 R19.2 | length 160.4
  Top Layer w10: LED5.1 R19.2
NetLED6_1: LED6.1 R20.2 | length 160.4
  Top Layer w10: LED6.1 R20.2
NetMK1_6: MK1.6 R16.2 U.CN10_31 | length 3721.2
  Top Layer w8: U.CN10_31 2578.99,659 2738.99,659 v1(2760,680)
  Top Layer w10: R16.2 1874.26,3490.17 v1(1874.26,3531.06) ; v1(2063.26,3411.06) 2063.26,3419.11 2072.26,3428.11 MK1.6
  Int1 (GND) w8: v1(1874.26,3531.06) 1934.26,3531.06 1962.26,3503.06 1962.26,3423.06 1974.26,3411.06 v1(2063.26,3411.06) 2063.26,3096.74 2820,2340 2820,740 v1(2760,680)
NetNEOPIXEL_2: NEOPIXEL.2 U.CN7_34 | length 3224.5
  Top Layer w8: U.CN7_34 514.75,794.75 v1(514.75,880) ; NEOPIXEL.2 1772,2792 1828,2792 1900,2720 1900,2370.76 v1(1955.38,2315.38)
  Int1 (GND) w8: v1(514.75,880) 520,880 v1(1955.38,2315.38)
NetR5_2: R5.2 U2.2 | length 474.7
  Top Layer w8: R5.2 2991.26,2090 U2.2
NetR17_1: R17.1 U.CN10_22 | length 1147.1
  Top Layer w8: R17.1 1937.6,450 1942.28,454.68 1942.28,502.28 2487,1047 2567,1047 U.CN10_22
NetR18_1: R18.1 U.CN10_24 | length 877.8
  Top Layer w8: R18.1 1971.97,450 2462.09,940.12 2560.12,940.12 U.CN10_24
NetR19_1: R19.1 U.CN10_36 | length 512.1
  Top Layer w8: R19.1 2171.97,450 2221.98,500 2440,500 2485,455 2521.74,455 2576.74,400 U.CN10_36
NetR20_1: R20.1 U.CN10_38 | length 344.5
  Top Layer w8: R20.1 2410,450 2440,420 2440,364.69 2464.57,340.12 2579.88,340.12 U.CN10_38
NetU1_4: U1.4 U.CN10_37 | length 2435.5
  Top Layer w8: v1(1420,740) 1440,740 1657.5,957.5 1657.5,1131.14 1650.64,1138 1620,1138 U1.4 ; U.CN10_37 2520,180 v1(2540,160)
  Int1 (GND) w8: v1(1420,740) 1420,200 1540,80 2460,80 v1(2540,160)
NetU2_3: U2.3 U.CN10_14 | length 1033
  Top Layer w8: U.CN10_14 3110,1990 U2.3
NetU_CN7_2: U.CN7_2 WIFI1.7 | length 3175.6
  Top Layer w8: U.CN7_2 v1(400,2100) ; v1(2100,2540) 2760,3200 WIFI1.7
  Int1 (GND) w8: v1(400,2100) 420,2120 1680,2120 v1(2100,2540)
NetU_CN7_32: U.CN7_32 WIFI1.8 | length 3967.2
  Top Layer w8: U.CN7_32 320,700 320,920 1600,2200 v1(1660,2200) ; v1(2040,2580) 2760,3300 WIFI1.8
  Int1 (GND) w8: v1(1660,2200) v1(2040,2580)
NetU_CN10_1: U.CN10_1 WIFI1.9 | length 1573.5
  Top Layer w8: U.CN10_1 2566.88,2146.88 2623.62,2146.88 3020,2543.26 3020,3320 WIFI1.9
NetU_CN10_11: U.CN10_11 WIFI1.4 | length 1889.4
  Top Layer w8: v1(2160,2100) 2160,1960 U.CN10_11 ; v1(2160,2320) 2740,2900 WIFI1.4
  Int1 (GND) w8: v1(2160,2100) v1(2160,2320)
NetU_CN10_13: U.CN10_13 WIFI1.5 | length 2143.9
  Top Layer w8: v1(2080,2100) 2080,1940 U.CN10_13 ; v1(2080,2320) 2760,3000 WIFI1.5
  Int1 (GND) w8: v1(2080,2100) v1(2080,2320)
NetU_CN10_15: U.CN10_15 WIFI1.6 | length 2418.5
  Top Layer w8: v1(2000,2100) 2000,1920 U.CN10_15 ; v1(2002.75,2320) 2002.75,2322.75 2640,2960 2780,3100 WIFI1.6 ; WIFI1.6@2940,3120 WIFI1.6@2960,3120
  Int1 (GND) w8: v1(2000,2100) 2001.38,2101.38 2001.38,2318.62 v1(2002.75,2320)
pads on no net: ALPHA-DISPL.5 ALPHA-DISPL.6 AMPL.1 AMPL.2 AMPL.3 AMPR.8 AMPR.9 AMPR.10 MK1. NEOPIXEL.4 NEOPIXEL.5 NEOPIXEL.6 SPKL.2 U.CN7_1 U.CN7_3 U.CN7_4 U.CN7_5 U.CN7_6 U.CN7_7 U.CN7_9 U.CN7_10 U.CN7_11 U.CN7_12 U.CN7_13 U.CN7_14 U.CN7_15 U.CN7_17 U.CN7_21 U.CN7_23 U.CN7_25 U.CN7_26 U.CN7_27 U.CN7_28 U.CN7_29 U.CN7_30 U.CN7_31 U.CN7_33 U.CN7_35 U.CN7_36 U.CN7_37 U.CN7_38 U.CN10_2 U.CN10_4 U.CN10_7 U.CN10_8 U.CN10_10 U.CN10_17 U.CN10_18 U.CN10_21 U.CN10_23 U.CN10_27 U.CN10_28 U.CN10_29 U.CN10_30 U.CN10_33 U.CN10_35 WIFI1.2 WIFI1.10

## Polygon pours and split planes (outlines as drawn)
GND on Int1 (GND) "NONET_L-01_P-001" (solid, pour order 0): 0,0 0,2530 1070,3600 3070,3600 4400,2270 4400,0
GND on Int2 (GND) "NONET_L-01_P-001" (solid, pour order 1): 1070,3600 3070,3600 4400,2270 4400,0 0,0 0,2530
GND on Bottom Layer "GND_L04_P002" (solid, pour order 2): 1070,3600 3070,3600 4400,2270 4400,0 0,0 0,2530

## Keep-outs
Keep-Out Layer:
  lines w20: 0,0 4340,0 4400,0 4400,60 4400,2270 3070,3600 1070,3600 0,2530 0,0

## Silkscreen, mask and mechanical layers (free items; w line width, h text height)
Top Overlay:
  lines w6: 1565,29 1565,488 1669,592 2408,592
  lines w20: 795,2640 1160,2640 ; 985,405 985,1080 ; 1120,90 1120,765 ; 1585,2640 1845,2640 ; 2855,2570 2855,2625 ; 2855,2775 2855,3425
  text "JJ-GEEX_HOMIE_rev_0-3__3/25/21" at 3031.21,3517.07 h60 r315
  text "Jonas Cooper - Ethan Radatz" at 3558.38,2887.07 h30 r315
  text "C" at 750,1720 h1300
  text "Diagnostics" at 1676,612.33 h40
  text "1" at 1761,59 h40
  text "3" at 2155,59 h40
  text "2" at 1955,58 h40
  text "4" at 2356,57 h40

## Text inside footprints (layer, text, board x,y; h text height)
U: Top Overlay "1" at 2495,2205.59 h50 r270; Top Overlay "2" at 2595,2204.45 h50 r270; Top Overlay "1" at 100,2205.59 h50 r270; Top Overlay "2" at 200,2204.45 h50 r270; Top Overlay "37" at 2495,230.59 h50 r270; Top Overlay "38" at 2595,229.45 h50 r270; Top Overlay "37" at 95,230.59 h50 r270; Top Overlay "38" at 195,229.45 h50 r270; Mechanical 13 "1" at 2495,2205.59 h50 r270; Mechanical 13 "2" at 2595,2204.45 h50 r270; Mechanical 13 "1" at 100,2205.59 h50 r270; Mechanical 13 "2" at 200,2204.45 h50 r270; Mechanical 13 "37" at 2495,230.59 h50 r270; Mechanical 13 "38" at 2595,229.45 h50 r270; Mechanical 13 "37" at 95,230.59 h50 r270; Mechanical 13 "38" at 195,229.45 h50 r270